# EAGLE board JesseTileTest (EAGLE 7.5.0)

Size 228 x 152 mm. Coordinates in mm from the lower left corner, seen from the top.
Outline: 10,10 10,78
Outline: 10,78 10,142
Outline: 10,78 218,78
Outline: 218,78 218,142 148,142
Outline: 148,142 80,142
Outline: 80,142 10,142
Outline: 10,142 10,10
Outline: 10,10 80,10
Outline: 80,10 148,10
Outline: 148,10 218,10 218,78
Outline: 148,142 148,10
Outline: 80,142 80,10
Outline: 0,0 0,152 228,152 228,0 0,0
Copper layers (1*16): Top 0.035mm / dielectric 1.5mm / Bottom 0.035mm
Design rules "default": minimum track width 10mil, minimum drill 24mil, track to track 8mil, track to pad 8mil, pad to pad 8mil, via to via 8mil, smd to smd 8mil, copper to edge 40mil, drill to drill 8mil, minimum pad ring 10mil, minimum via ring 8mil, stop-mask expansion 4mil, vias tented up to drill 0mil, thermal gap 10mil

## Footprints (pad centres in the part's own frame; a part is rotated, then mirrored left to right if it is on the bottom)
ARDUINO_R3 = drill 1.016 pad 1.93: 3.3V 35.56,2.54; 5V 38.1,2.54; A0 50.8,2.54; A1 53.34,2.54; A2 55.88,2.54; A3 58.42,2.54; A4 60.96,2.54; A5 63.5,2.54; AREF 23.876,50.8; D0 63.5,50.8; D1 60.96,50.8; D2 58.42,50.8; D3 55.88,50.8; D4 53.34,50.8; D5 50.8,50.8; D6 48.26,50.8; D7 45.72,50.8; D8 41.656,50.8; D9 39.116,50.8; D10 36.576,50.8; D11 34.036,50.8; D12 31.496,50.8; D13 28.956,50.8; GND@1 40.64,2.54; GND@2 43.18,2.54; GND@3 26.416,50.8; GND@4 66.18,25.35; IOREF 30.48,2.54; MISO 63.64,30.43; MOSI 66.18,27.89; NC 27.94,2.54; RESET@1 33.02,2.54; RESET@2 63.64,25.35; SCK 63.64,27.89; SCL 18.796,50.8; SDA 21.336,50.8; VCC 66.18,30.43; VIN 45.72,2.54 | hole 3.175: 15.24,50.8; 66.04,35.56; 66.04,7.62; 13.97,2.54
W237-102 = drill 1.194 long: 1 -2.5,-1.27; 2 2.5,-1.27

## Placement (x,y rotation side)
E$1  [ARDUINO_R3]  148,83 0 top
E$2  [ARDUINO_R3]  79,83 0 top
E$3  [ARDUINO_R3]  10,83 0 top
E$4  [ARDUINO_R3]  148,18 0 top
E$5  [ARDUINO_R3]  79,19 0 top
E$6  [ARDUINO_R3]  10,19 0 top
E$7  [W237-102]  24.13,118.75 90 top
E$8  [W237-102]  24.13,107.95 90 top

## Library data of the parts
E$1-E$6 = SparkFun-Boards
E$7 E$8 = con-wago-500